# Altium PCB RelayPCB1.3_routing.pcbdoc
Units mm, origin at the board's own origin, x right, y up, seen from the top; angles counter-clockwise.
Board outline 104.86 x 67.85 mm, 2 copper layers (Top Layer, Bottom Layer); 17 components, 14 nets, 45 pads, 0 vias.
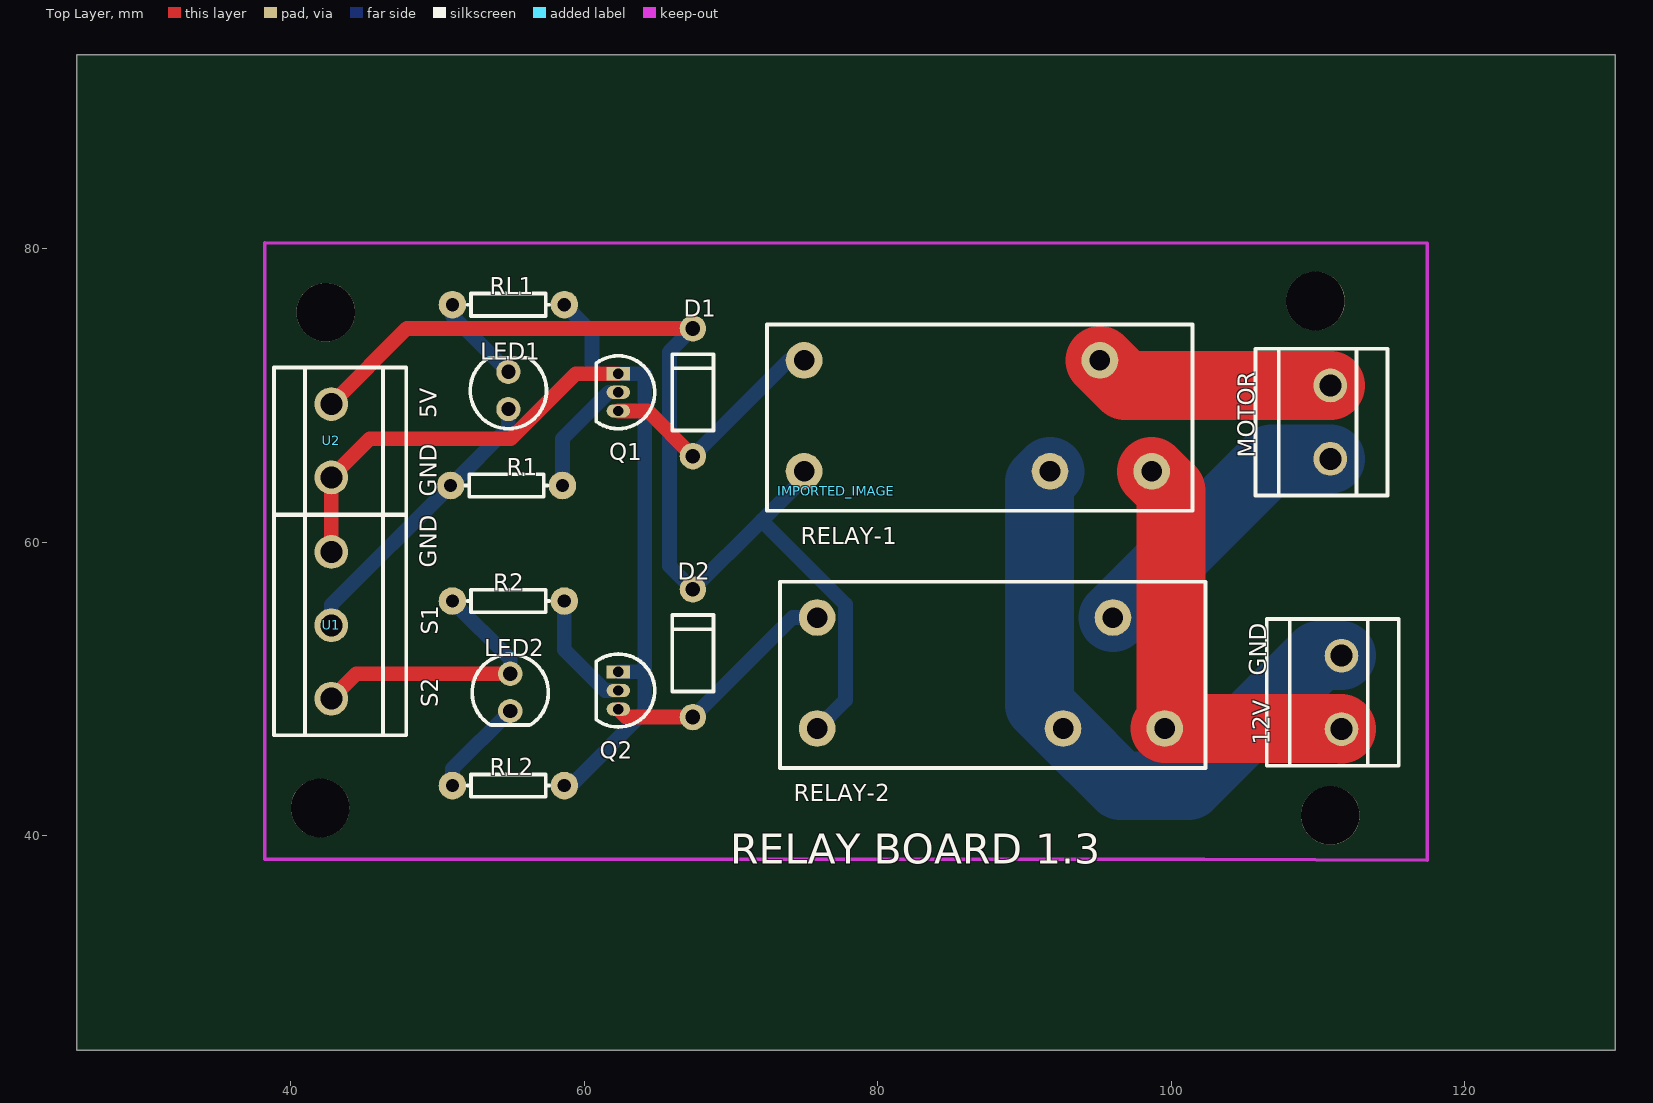
[diagram p0: Top Layer view]
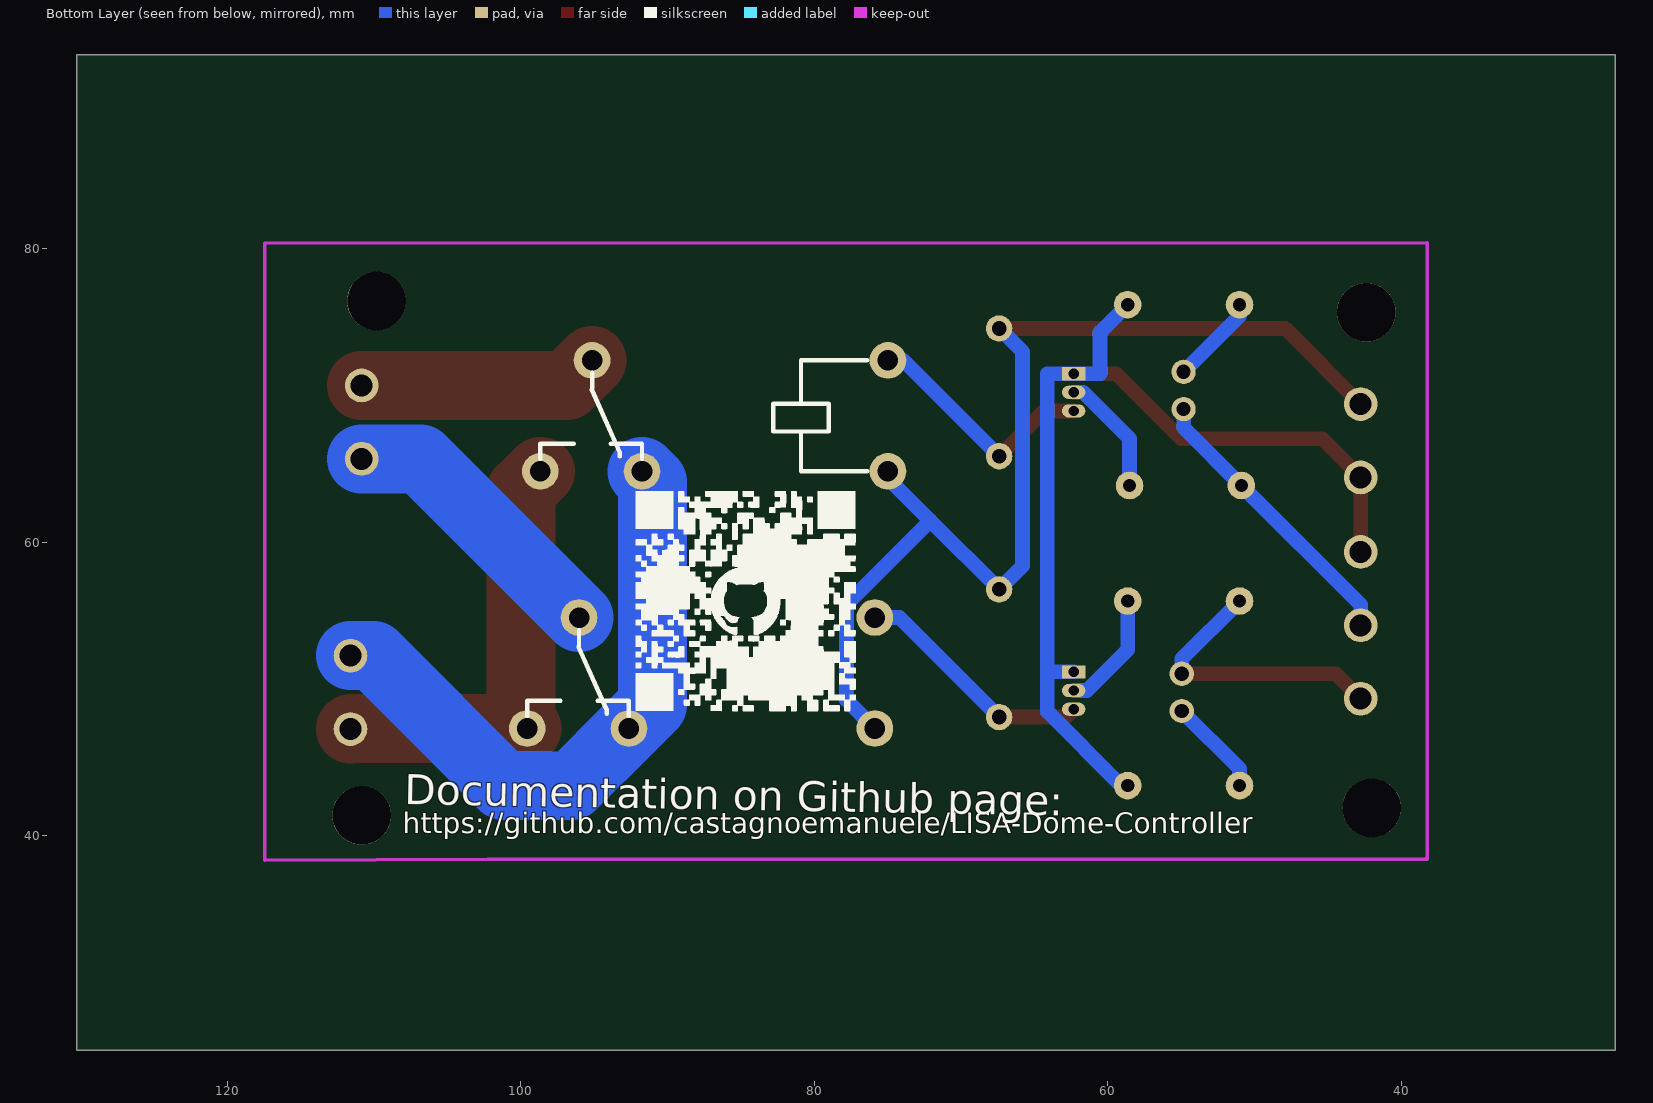
[diagram p1: Bottom Layer view, seen from below]

## Layer stack, top to bottom
Top Layer: signal copper (thickness not stored)
Dielectric: dielectric 0.32, FR-4, Dk 4.8
Bottom Layer: signal copper (thickness not stored)

## Board outline
130.264,25.4 25.4,25.4 25.4,93.248 130.264,93.248

## Components (designator, comment, footprint, x,y, rotation, side; value= is the part's Value field where it differs from the comment)
12V "XY126V-5.0-2P" CONN-TH_XY126V-5.0-2P 111.595,49.784 r270 top
D1 "1N4007" DO-41_BD2.4-L4.7-P8.70-D0.9-RD 67.399,70.231 r270 top
D2 "1N4007" DO-41_BD2.4-L4.7-P8.70-D0.9-RD 67.399,52.451 r270 top
IMPORTED_IMAGE "IMPORTED_IMAGE" IMPORTED_IMAGE 77.18,63.5 r0 top
LED1 "LED-TH-5mm_R" LED-TH_BD5.0_RED 54.826,70.358 r180 top
LED2 "LED-TH-5mm_R" LED-TH_BD5.0_RED 54.953,49.784 r0 top
MOTOR "XY126V-5.0-2P" CONN-TH_XY126V-5.0-2P 110.833,68.199 r270 top
Q1 "2N2222" TO-92-3_L4.9-W3.7-P1.27-L 62.319,70.231 r270 top
Q2 "2N2222" TO-92-3_L4.9-W3.7-P1.27-L 62.319,49.911 r270 top
R1 "1k" R_AXIAL-0.3 54.699,63.881 r0 top
R2 "1k" R_AXIAL-0.3 54.826,56.007 r0 top
RELAY-1 "Powerrelais RT114005" "SCHRACK PCB RELAIS 1393239-7" 101.435,74.803 r180 top
RL1 "220" R_AXIAL-0.3 54.826,76.2 r180 top
RL2 "220" R_AXIAL-0.3 54.826,43.434 r180 top
U1 "XY126V-5.0-3P" CONN-TH_XY126V-5.0-3P 42.761,54.356 r90 top
U2 "XY126V-5.0-2P" CONN-TH_XY126V-5.0-2P 42.761,66.929 r90 top
? "" ? 44.812,61.913 r0 top

## Footprints (in the part's own frame and the unit in brackets; to place one, negate y for a bottom-side part, rotate by r counter-clockwise, add the part's x,y. Pads: shape width x height; smd on the part's side, far side on the other; paste and mask are expansions set on the pad)
CONN-TH_XY126V-5.0-2P [mm]
  round 2.3 hole 1.5 paste+0 mask+0.051: 1(-2.5,0) 2(2.5,0)
  silkscreen extent -5,-5.1 5,3.9
CONN-TH_XY126V-5.0-3P [mm]
  round 2.3 hole 1.5 paste+0 mask+0.051: 1(-5,0) 2(0,0) 3(5,0)
  silkscreen extent -7.5,-5.1 7.5,3.9
DO-41_BD2.4-L4.7-P8.70-D0.9-RD [mm]
  round 1.8 hole 1 paste+0 mask+0.051: 1(-4.35,0) 2(4.35,0)
  silkscreen extent -2.6,-1.4 2.6,1.4
IMPORTED_IMAGE [mm]
LED-TH_BD5.0_RED [mil]
  round 65 hole 38 paste+0 mask+2: 1(0,50) 2(0,-50)
  silkscreen extent -102,-88 102,102
R_AXIAL-0.3 [mil]
  round 74 hole 35.4 paste+0 mask+2: 1(-150,0) 2(150,0)
  silkscreen extent -110,-30 110,30
"SCHRACK PCB RELAIS 1393239-7" [mm]
  round 2.5 hole 1.4 paste+0 mask+0.102: 11(6.3,2.394) 12(9.702,9.954) 14(2.772,9.954) A1(26.46,9.954) A2(26.46,2.394)
  silkscreen extent -0.01,-0.05 28.99,12.65
TO-92-3_L4.9-W3.7-P1.27-L [mm]
  rect 0.9x1.6 hole 0.7 paste+0 mask+0.051: 1(-1.27,0)
  oval 0.9x1.6 hole 0.7 paste+0 mask+0.051: 2(0,0) 3(1.27,0)
  silkscreen extent -2.48,-1.5 2.48,2.48
? [mm]

## Free pads (board coordinates)
  round 2.5 hole 1.4 paste+0 mask+0.102: 11(96.024,54.883) 12(92.622,47.323) 14(99.552,47.323) A1(75.864,47.323) A2(75.864,54.883)
  round 4 hole 4 unplated paste+0: ""(41.999,41.91) ""(42.38,75.692) ""(109.817,76.454) ""(110.833,41.402)

## Nets (pads, with @x,y where several pads share a name; then routed paths per layer and width w, separated by ;. In a path a pad name is that pad's centre, name@x,y a point inside that pad or via, vN(x,y) a via of type N, cw(c..) or ccw(c..) an arc to the next point about the centre after c; other vN are vias at no path point)
12V_1: 12V.1 pad.12 RELAY-1.12 | length 42.8
  Bottom Layer w4.7: RELAY-1.12 91.006,64.122 91.006,48.939 pad.12 96.523,43.423 101.168,43.423 110.029,52.284 12V.1
12V_2: 12V.2 pad.14 RELAY-1.14 | length 30.3
  Top Layer w4.7: RELAY-1.14 99.987,63.525 99.987,47.758 pad.14 111.556,47.323 12V.2
D1_1: D1.1 D2.1 pad.A1 RELAY-1.A1 U2.2 | length 74.4
  Top Layer w1: U2.2 47.913,74.581 D1.1
  Bottom Layer w1: D1.1 65.799,72.981 65.799,58.401 D2.1 72.091,61.493 ; RELAY-1.A1 74.975,64.377 72.091,61.493 ; pad.A1 77.793,49.252 77.793,55.79 72.091,61.493
D1_2: D1.2 Q1.3 RELAY-1.A2 | length 16.6
  Top Layer w1: Q1.3 64.319,68.961 D1.2
  Bottom Layer w1: D1.2 73.927,72.409 RELAY-1.A2
D2_2: D2.2 pad.A2 Q2.3 | length 16.6
  Top Layer w1: Q2.3 62.859,48.101 D2.2
  Bottom Layer w1: D2.2 74.181,54.883 pad.A2
LED1_1: LED1.1 R1.1 U1.2 | length 19.7
  Bottom Layer w1: U1.2 42.761,55.753 R1.1 54.826,67.818 LED1.1
LED1_2: LED1.2 RL1.2 | length 6.2
  Bottom Layer w1: RL1.2 51.016,75.438 LED1.2
LED2_1: LED2.1 R2.1 U1.1 | length 19.5
  Top Layer w1: U1.1@42.761,49.356 44.459,51.054 LED2.1
  Bottom Layer w1: R2.1 54.953,52.07 LED2.1
LED2_2: LED2.2 RL2.2 | length 6.7
  Bottom Layer w1: RL2.2 51.016,44.577 LED2.2
MOTOR1_1: MOTOR.1 RELAY-1.11 | length 16.4
  Top Layer w4.7: RELAY-1.11 96.845,70.698 104.272,70.698 MOTOR.1
MOTOR1_2: MOTOR.2 pad.11 | length 19.3
  Bottom Layer w4.7: pad.11 106.84,65.699 MOTOR.2
R1_2: Q1.2 R1.2 | length 8.3
  Bottom Layer w1: R1.2 58.509,67.064 61.676,70.231 Q1.2
R2_2: Q2.2 R2.2 | length 8.2
  Bottom Layer w1: R2.2 58.636,52.689 61.414,49.911 Q2.2
RL2_1: Q1.1 Q2.1 RL1.1 RL2.1 U1.3 U2.1 | length 69
  Top Layer w1: U1.3 U2.1 45.393,67.06 54.977,67.06 59.418,71.501 Q1.1
  Bottom Layer w1: RL2.1 59.067,43.434 64.12,48.487 64.12,51.181 ; RL1.1 60.518,74.318 60.518,71.501 61.419,71.501 Q1.1 64.12,71.501 64.12,51.181 ; Q2.1 64.12,51.181

## Silkscreen, mask and mechanical layers (free items; w line width, h text height)
Top Overlay:
  lines w0.254: 73.335,44.628 102.334,44.628 102.334,55.222 102.334,57.328 73.335,57.328 73.335,44.628
  text "5V" at 49.937,68.453 h1.14 r90
  text "GND" at 49.937,63.119 h1.14 r90
  text "GND" at 49.937,58.293 h1.14 r90
  text "S1" at 50.064,53.721 h1.14 r90
  text "GND" at 106.452,50.927 h1.14 r90
  text "S2" at 50.064,48.768 h1.14 r90
  text "RELAY-2" at 74.257,42.355 h1.14
  text "RELAY BOARD 1.3" at 69.939,38.1 h2.03
Bottom Overlay:
  lines w0.3: 92.622,48.177 92.622,49.213 94.764,49.213 ; 94.134,48.331 94.134,48.583 96.047,52.884 96.024,52.994 96.024,54.03 ; 97.284,49.213 98.696,49.214 99.552,49.214 99.552,48.178
  text "Documentation on Github page:" at 107.93,42.164 h2.03 r1
  text "https://github.com/castagnoemanuele/LISA-Dome-Controller" at 108.039,40.194 h1.4